# Altium PCB Pds 1st design.PcbDoc
Units mm, origin at the board's own origin, x right, y up, seen from the top; angles counter-clockwise.
Board outline 226.3 x 159.65 mm, 2 copper layers (Top Layer, Bottom Layer); 35 components, 11 nets, 58 pads, 10 vias.
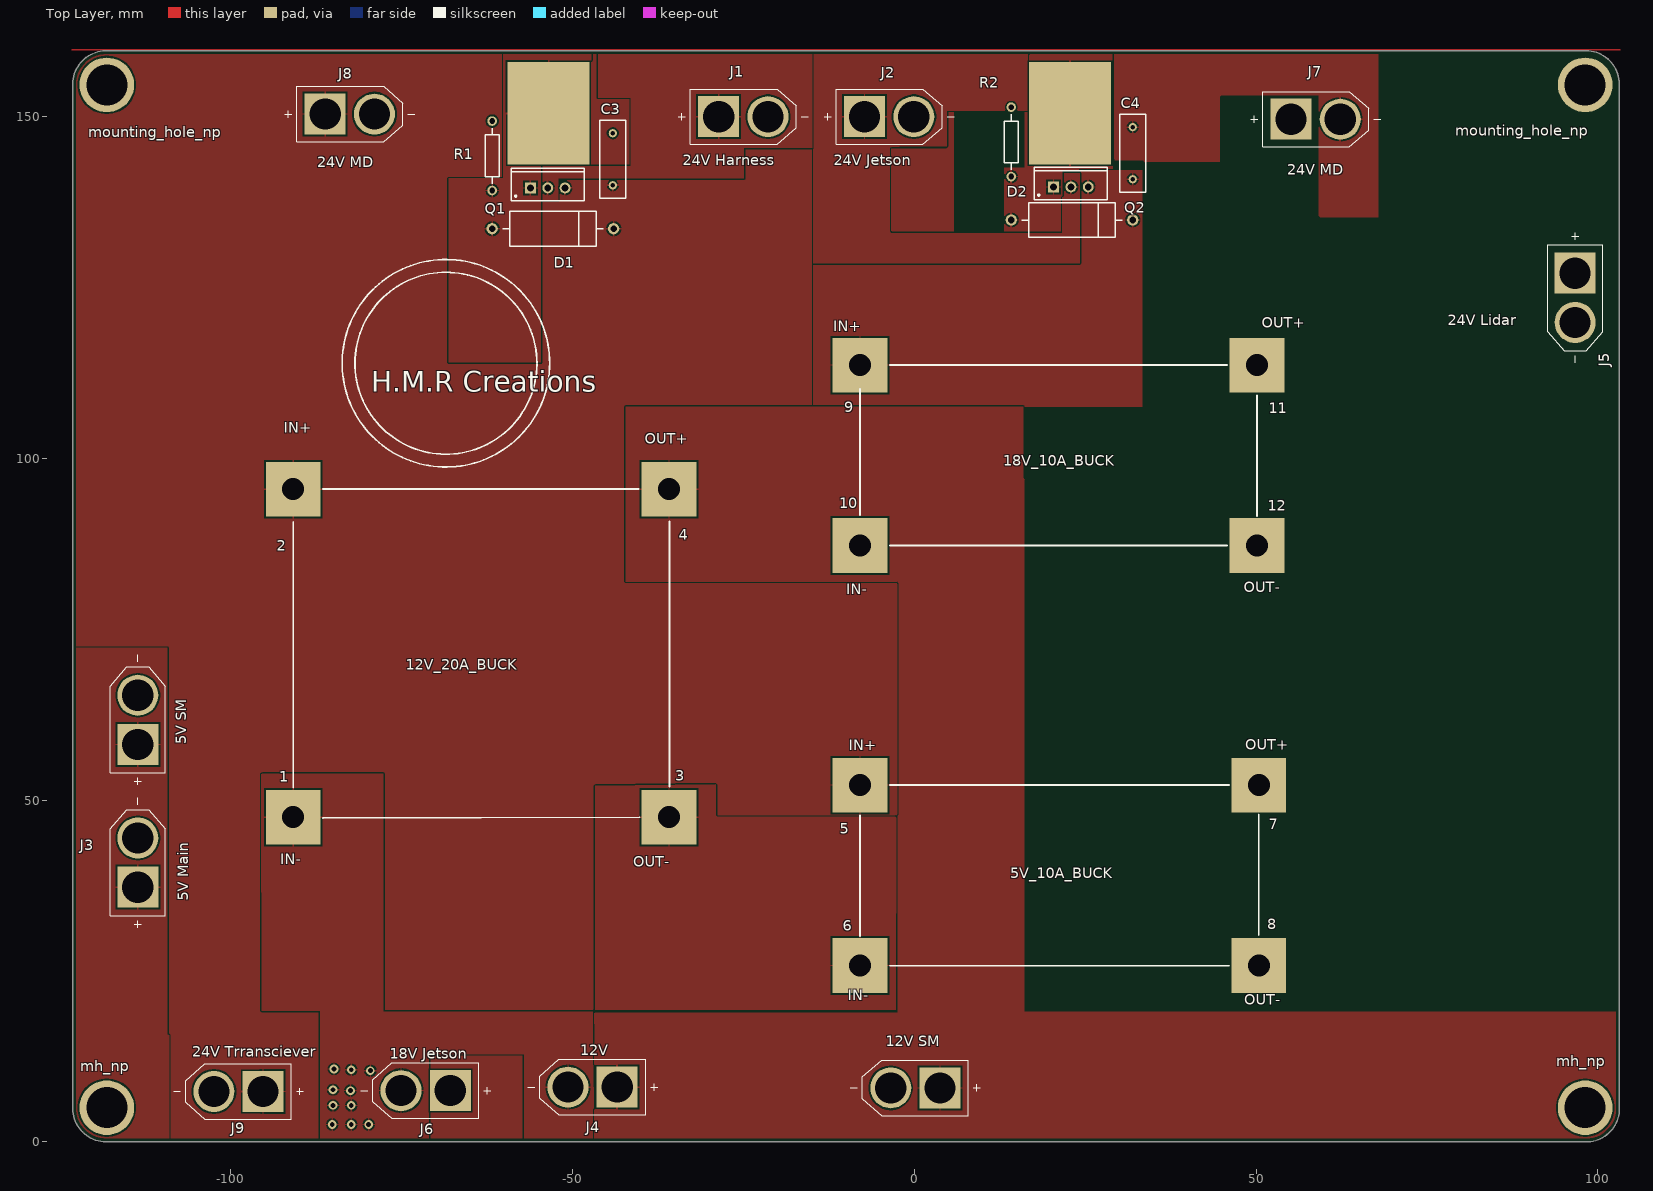
[diagram p0: Top Layer view]
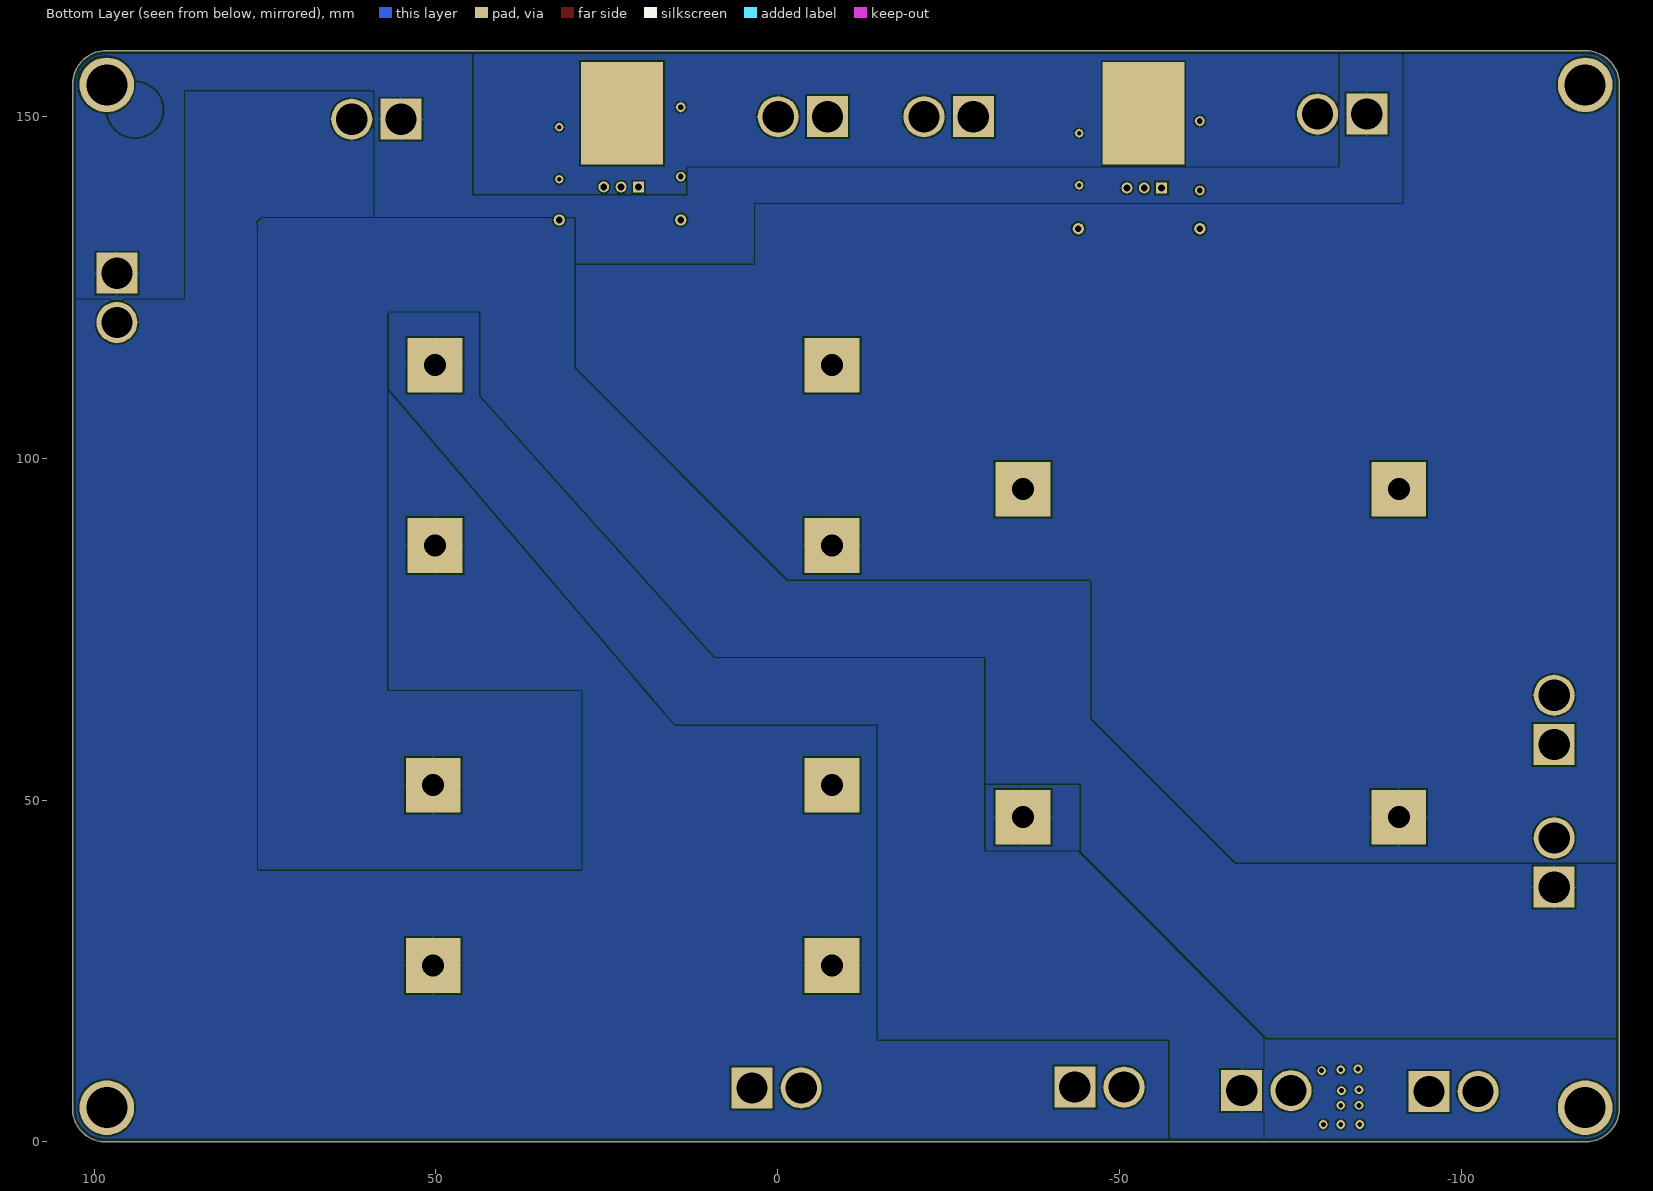
[diagram p1: Bottom Layer view, seen from below]
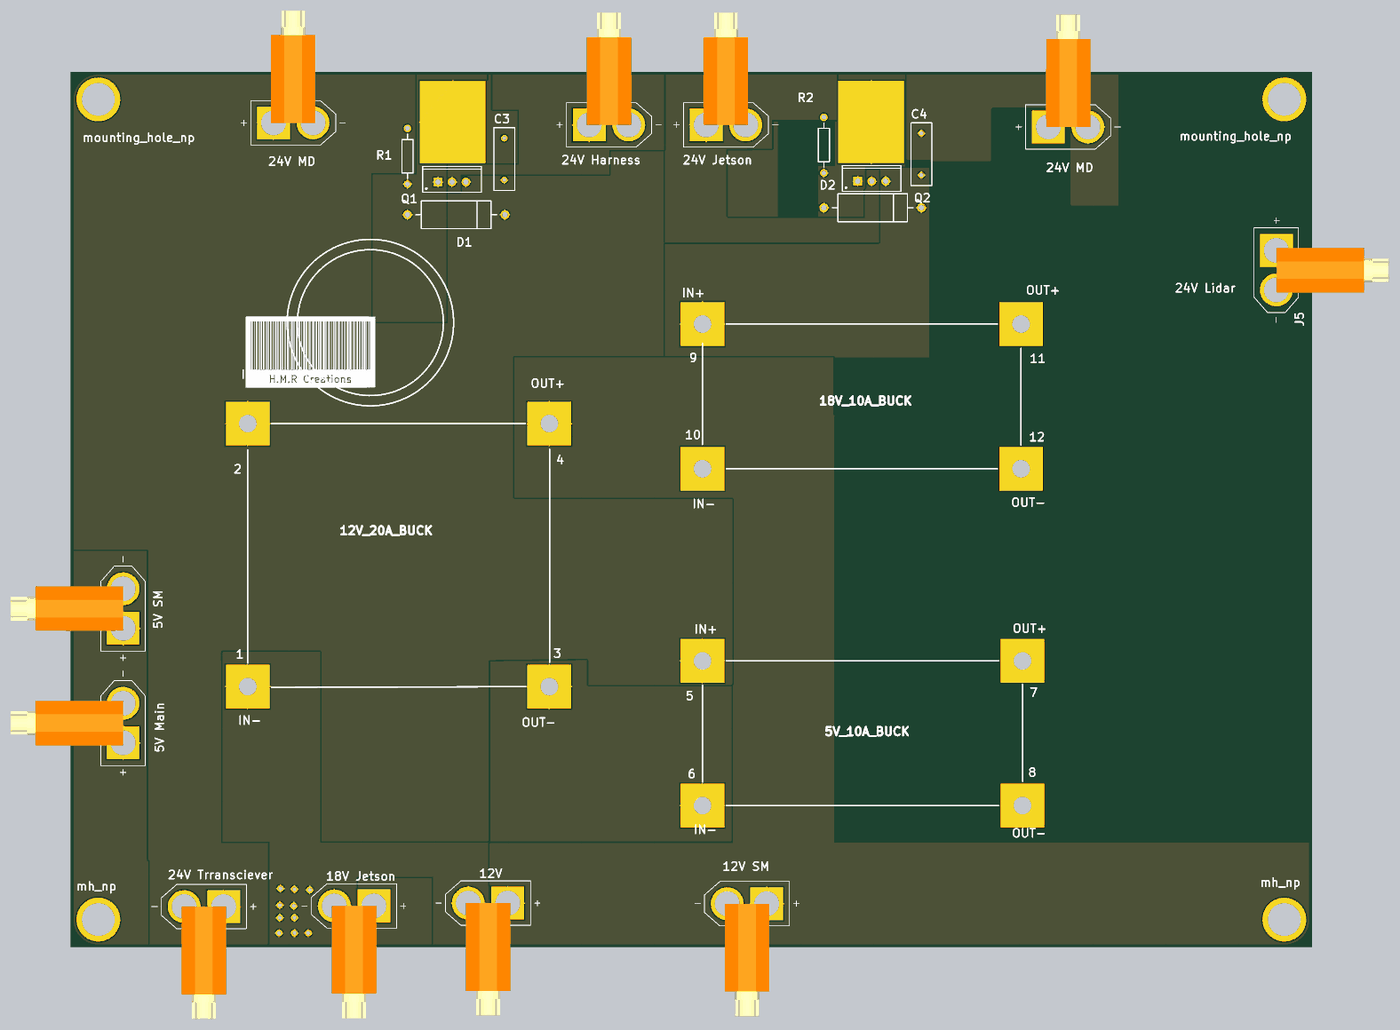
[diagram p2: 3D render of the assembled board from above, using the file's embedded part models]

## Layer stack, top to bottom
Top Solder: solder mask 0.0102, Solder Resist, Dk 3.5
Top Layer: signal copper 0.035
Dielectric 1: dielectric 0.32, FR-4, Dk 4.8
Bottom Layer: signal copper 0.035
Bottom Solder: solder mask 0.0102, Solder Resist, Dk 3.5

## Board outline
-123.15,154.542 -123.15,4.963 ccw(c-123.322,4.965) -123.15,4.965 ccw(c-123.277,4.965) -123.15,4.968 -123.15,4.866 ccw(c-118.237,4.913) -118.289,0 cw(c-118.286,-0.72) -118.289,0 98.596,0 ccw(c98.288,4.857) 103.145,4.549 103.145,154.717 cw(c103.272,154.717) 103.145,154.72 ccw(c98.333,154.751) 103.145,154.752 ccw(c98.251,154.752) 98.285,159.645 cw(c98.286,159.773) 98.251,159.65 cw(c98.217,159.773) 98.217,159.645 -118.29,159.645 cw(c-118.29,159.773) -118.333,159.653 cw(c-118.376,159.773) -118.372,159.645 ccw(c-118.209,154.705) -123.152,154.806 cw(c-123.278,154.785) -123.15,154.785 -123.15,154.535 ccw(c-123.278,154.538) -123.15,154.538 ccw(c-123.277,154.538) -123.15,154.541 ccw(c-123.279,154.538)

## Design rules (kind name [scope] priority, off if disabled: settings)
BoardOutlineClearance [All] p1: gap=0.254 ignorepadtopadclearanceinfootprint=FALSE except(0: Arc-SplitContinuation Track-SplitContinuation SMDPad-SplitContinuation THPad-SplitContinuation Via-SplitContinuation Fill-SplitContinuation Poly-SplitContinuation Region-SplitContinuation Text-SplitContinuation; 0.5: Arc-OutlineEdge Track-OutlineEdge SMDPad-OutlineEdge THPad-OutlineEdge Via-OutlineEdge Fill-OutlineEdge Poly-OutlineEdge Region-OutlineEdge Text-OutlineEdge)
Clearance "Schematic Clearance Constraint" [All] p1: gap=0.254 ignorepadtopadclearanceinfootprint=FALSE except(0: Arc-Hole Track-Hole SMDPad-Hole THPad-Hole Via-Hole Fill-Hole Poly-Hole Region-Hole Text-Hole)
Clearance [All] p2: gap=0.254 ignorepadtopadclearanceinfootprint=TRUE except(0: Arc-Hole Track-Hole SMDPad-Hole THPad-Hole Via-Hole Fill-Hole Poly-Hole Region-Hole Text-Hole; 0.1: Arc-SMDPad Track-SMDPad; 0.15: Arc-Arc Arc-Track Track-Track; 1: Fill-Fill Fill-Poly Fill-Region Poly-Poly Poly-Region Region-Region)
HoleSize PTH_HoleSize [All] p1: absolutevalues=TRUE maxlimit=2539.975 minlimit=0.5 maxpercent=100.000 minpercent=20.000
MinimumSolderMaskSliver [All] p1: minsoldermaskwidth=0.08
PolygonConnect [All] p1: connectstyle=Relief reliefconductorwidth=0.254 reliefentries=4 polygonreliefangle="90 Angle" airgapwidth=0.254
RoutingVias [All] p1: holewidth=0.711 width=1.27 viastyle="Through Hole" minholewidth=0.711 minwidth=1.27 maxholewidth=0.711 maxwidth=1.27
SMDToCorner [All] p1: distance=0
SilkToSilkClearance [All] p1: silktosilkclearance=0
SilkToSolderMaskClearance [IsPad] p1: minsilkscreentomaskgap=0 clearancetoexposedcopper=TRUE
SolderMaskExpansion [All] p1: expansion=0.102 istentingtop=FALSE
Width [All] p1: maxlimit=0.254 minlimit=0.15 preferedwidth=0.254
26 further rules are at their usual default settings.

## Classes and differential pairs
component class Sheet1: 2 4 5 6 7 8 9 10 11 12 C3 C4 D1 D2 J1 J2 J3 J4 J5 J6 J7 J8 J9 Q1 Q2 R1 R2 rail

## Components (designator, comment, footprint, x,y, rotation, side; value= is the part's Value field where it differs from the comment)
1 "mounting_h_p_10A buck" "mounting_h_p 10A buck"#1 -90.892,47.498 r90 top
2 "mounting_h_p_10A buck" "mounting_h_p 10A buck"#2 -90.892,93.138 r90 top
3 "mounting_h_p_10A buck" "mounting_h_p 10A buck"#3 -38.252,47.498 r90 top locked
4 "mounting_h_p_10A buck" "mounting_h_p 10A buck"#4 -38.252,93.138 r90 top
5 "mounting_h_p_10A buck" "mounting_h_p 10A buck"#1 -7.961,52.197 r90 top
"5V SM" "Comment" AMASS_XT60-M -113.625,61.742 r90 top
6 "mounting_h_p_10A buck" "mounting_h_p 10A buck"#1 -7.961,25.797 r90 top
7 "mounting_h_p_10A buck" "mounting_h_p 10A buck"#1 50.393,52.197 r90 top
8 "mounting_h_p_10A buck" "mounting_h_p 10A buck"#1 50.393,25.797 r90 top
9 "mounting_h_p_10A buck" "mounting_h_p 10A buck"#1 -7.961,113.649 r90 top
10 "mounting_h_p_10A buck" "mounting_h_p 10A buck"#1 -7.961,87.249 r0 top
11 "mounting_h_p_10A buck" "mounting_h_p 10A buck"#1 50.139,113.649 r0 top
12 "mounting_h_p_10A buck" "mounting_h_p 10A buck"#1 50.139,87.249 r0 top
"12V SM" "Comment" AMASS_XT60-M 0.148,7.894 r180 top
C3 "Cap" RAD-0.3 -44.121,143.764 r270 top value=100pF
C4 "Cap" RAD-0.3 31.952,144.653 r270 top value=100pF
D1 "D Zener" DIODE-0.7 -52.884,133.604 r0 top
D2 "D Zener" DIODE-0.7 23.062,134.876 r0 top
J1 "XT60-M" AMASS_XT60-M -25.023,149.987 r0 top
J2 "XT60-M" AMASS_XT60-M -3.687,149.987 r0 top
J3 "XT60-M" AMASS_XT60-M -113.627,40.856 r90 top
J4 "XT60-M" AMASS_XT60-M -47.077,8.001 r180 top
J5 "XT60-M" AMASS_XT60-M 96.687,123.488 r270 top
J6 "XT60-M" AMASS_XT60-M -71.505,7.493 r180 top
J7 "XT60-M" AMASS_XT60-M 58.713,149.62 r0 top
J8 "XT60-M" AMASS_XT60-M -82.602,150.368 r0 top
J9 "XT60-M" AMASS_XT60-M -98.893,7.366 r180 top
mh_np "Comment" np_20A_mountinghole#1 -117.908,5.08 r0 top
mh_np "Comment" np_20A_mountinghole#2 98.246,4.953 r0 top
mounting_hole_np "Comment" np_20A_mountinghole#3 98.246,154.686 r0 top
mounting_hole_np "Comment" np_20A_mountinghole#4 -118.162,154.559 r0 top
Q1 "PMOS-2" TO-220AB -53.646,139.573 r0 top
Q2 "PMOS-2" TO-220AB 22.9,139.72 r0 top
R1 "Res2" AXIAL-0.4 -61.774,144.272 r270 top value=1K
R2 "Res2" AXIAL-0.4 14.172,146.304 r270 top value=1K

## Footprints (in the part's own frame and the unit in brackets; to place one, negate y for a bottom-side part, rotate by r counter-clockwise, add the part's x,y. Pads: shape width x height; smd on the part's side, far side on the other; paste and mask are expansions set on the pad)
AMASS_XT60-M [mm]
  round 6 hole 4.55: N(3.6,0)
  rect 6x6 hole 4.55: P(-3.6,0)
  silkscreen extent -9.5,-4.05 9.5,4.05, body extent -4.05,0 4.05,20.5, height 7.75
AXIAL-0.4 [mm] "Axial Device, Thru-Hole; 2 Leads; 0.4 in Pin Spacing"
  round 1.4 hole 0.85: 1(-5.08,0) 2(5.08,0)
  silkscreen extent -4.06,-1.02 4.06,1.02
DIODE-0.7 [mm] "Diode, Thru-Hole; 2 Leads; 0.7 in Pin Spacing"
  round 1.65 hole 1: 1(-8.89,0) 2(8.89,0)
  silkscreen extent -7.37,-2.54 7.37,2.54
"mounting_h_p 10A buck"#1 [mm]
  rect 8x8 hole 3.22 mask+0.102: ""(0,0)
"mounting_h_p 10A buck"#2 [mm]
  rect 8x8 hole 3.22 mask+0.102: ""(2.36,0)
"mounting_h_p 10A buck"#3 [mm]
  rect 8x8 hole 3.22 mask+0.102: ""(0,-2.36)
"mounting_h_p 10A buck"#4 [mm]
  rect 8x8 hole 3.22 mask+0.102: ""(2.36,-2.36)
np_20A_mountinghole#1 [mm]
  round 8 hole 6 unplated: MH_NP_6mm(-0.242,-0.08)
np_20A_mountinghole#2 [mm]
  round 8 hole 6 unplated: MH_NP_6mm(-0.101,0.047)
np_20A_mountinghole#3 [mm]
  round 8 hole 6 unplated: MH_NP_6mm(-0.101,-0.041)
np_20A_mountinghole#4 [mm]
  round 8 hole 6 unplated: MH_NP_6mm(0.012,0.086)
RAD-0.3 [mm] "Radial Cap, Thru-Hole; 2 Leads; 0.3 in Pin Spacing"
  round 1.2 hole 0.7: 1(-3.81,0) 2(3.81,0)
  silkscreen extent -5.71,-1.91 5.71,1.91
TO-220AB [mm] "TO, Thru-Hole, Vertical, Heatsink Mounted; 3 In-Line Leads; Pitch 2.54 mm"
  rect 1.6x1.6 hole 1: 1(-2.54,0)
  round 1.6 hole 1: 2(0,0) 3(2.54,0)
  silkscreen extent -5.35,-1.85 5.35,2.85, body extent -5.4,-1.9 5.4,2.9, height 19.3

## Part data
C3 C4: "Capacitor", LatestRevisionDate=17-Jul-2002, LatestRevisionNote="Re-released for DXP Platform.", PackageDescription="Radial Cap, Thru-Hole; 2 Leads; 0.3 in Pin Spacing", PackageReference=RAD-0.3, Published=8-Jun-2000, Publisher="Altium Limited"
D1 D2: "Zener Diode", LatestRevisionDate=17-Jul-2002, LatestRevisionNote="Re-released for DXP Platform.", PackageDescription="Diode, Thru-Hole; 2 Leads; 0.7 in Pin Spacing", PackageReference=DIODE-0.7, Published=8-Jun-2000, Publisher="Altium Limited"
J1 J2 J3 J4 J5 J6 J7 J8 J9: "Plug; DC supply; XT60; male; PIN: 2; for cable; soldered; 30A; 500V", Package=Package, Availability="Not in stock", Check_prices=https://www.snapeda.com/parts/XT60-M/AMASS/view-part/?ref=eda, MF=AMASS, MP=XT60-M, Price=None, SnapEDA_Link=https://www.snapeda.com/parts/XT60-M/AMASS/view-part/?ref=snap
Q1 Q2: "P-Channel Power MOSFET", ComponentLink1Description="Manufacturer Link", ComponentLink1URL=http://www.irf.com/, DatasheetVersion=PD-9.390D, LatestRevisionDate=17-Jul-2002, LatestRevisionNote="Re-released for DXP Platform.", Note="Pin 4 not drawn and electrically connected to Pin 2.", PackageDescription="TO, Thru-Hole, Vertical, Heatsink Mounted; 3 In-Line Leads; Pitch 2.54 mm", PackageReference=TO-220AB, PackageVersion=Feb-1997, Published=8-Jun-2000, Publisher="Altium Limited"
R1 R2: "Resistor", LatestRevisionDate=17-Jul-2002, LatestRevisionNote="Re-released for DXP Platform.", PackageDescription="Axial Device, Thru-Hole; 2 Leads; 0.4 in Pin Spacing", PackageReference=AXIAL-0.4, Published=8-Jun-2000, Publisher="Altium Limited"

## Free pads (board coordinates)
  rect 12x15 all layers, no hole: 4(-53.519,150.495) 5(22.773,150.515)

## Via types
v1: diameter 1.27, hole 0.711, Top Layer to Bottom Layer, 10 vias

## Nets (pads, with @x,y where several pads share a name; then routed paths per layer and width w, separated by ;. In a path a pad name is that pad's centre, name@x,y a point inside that pad or via, vN(x,y) a via of type N, cw(c..) or ccw(c..) an arc to the next point about the centre after c; other vN are vias at no path point)
GND: 1. 3. 6. 8. 10. 12. "5V SM.N" "12V SM.N" C3.1 C4.1 J1.N J2.N J3.N J4.N J5.N J6.N J7.N J8.N J9.N R1.1 R2.1 | length 1.2
  Top Layer w0.254: J7.N@62.313,148.634 J7.N
  Bottom Layer w0.254: 1.@-90.349,46.863 1.@-90.222,46.736
  other v1: -85.177,2.54 -82.383,2.54 -79.843,2.54 -85.05,5.334 -82.383,5.334 -82.51,7.493 -85.05,7.62 -79.589,10.414 -82.383,10.541 -84.923,10.668
Net1_1: 2. 5. C3.2 D1.2 J5.P J7.P J8.P J9.P Q1.3
Net3_1: 4. "12V SM.P" J4.P
Net5_1: 9. C4.2 D2.2 Q2.3
Net7_1: 11. J6.P
Net8_1: 
Net11_1: 7. "5V SM.P" J3.P
NetD1_1: D1.1 pad.4 Q1.1 R1.2
NetD2_1: D2.1 pad.5 Q2.1 R2.2
NetJ1_P: J1.P Q1.2
NetJ2_P: J2.P Q2.2
pads on no net: mh_np.MH_NP_6mm mounting_hole_np.MH_NP_6mm

## Polygon pours and split planes (outlines as drawn)
Net1_1 on Top Layer "NET1_1_L01_P068" (solid, pour order 68): 5.755,159.786 5.755,0.061 5.542,0.274 -123.277,0.274 -123.277,159.772 -123.277,159.773 -123.264,159.786 -123.023,159.786 -123.264,159.786 -123.023,159.786
Net11_1 on Top Layer "NET11_1_L01_P067" (solid, pour order 67): -123.15,72.537 -109.053,72.537 -109.053,0.068 -123.15,0.068 -123.15,72.41
Net3_1 on Top Layer "NET3_1_L01_P066" (solid, pour order 66): -2.246,0.274 -2.246,19.07 103.037,19.07 103.037,0.274
GND on Top Layer "GND_L01_P064" (solid, pour order 64): -77.703,53.848 -77.703,51.126 -77.703,0 -86.031,0 -86.92,0.889 -86.92,19.177 -95.81,19.177 -95.81,53.848 -95.81,19.177 -95.81,53.848
Net1_1 on Top Layer "NET1_1_L01_P013" (solid, pour order 13): -123.277,159.773 -95.888,159.773 -95.733,0 -109.053,0 -109.053,15.875 -109.053,72.537 -123.277,72.537
GND on Top Layer "GND_L01_P063" (solid, pour order 63): 29.223,143.327 29.223,143.448 29.223,159.645 67.506,159.645 67.893,159.258 67.893,135.255 59.384,135.255 59.13,135.509 59.13,153.162 44.906,153.162 44.652,152.908 44.652,143.383
Net5_1 on Top Layer "NET5_1_L01_P060" (solid, pour order 60): -14.784,128.524 -14.784,107.569 33.349,107.569 33.349,142.133 24.205,142.133 24.205,128.524
NetJ2_P on Top Layer "NETJ2_P_L01_P059" (solid, pour order 59): -14.504,159.645 -14.498,159.639 -3.608,159.639 -3.608,133.223 -3.354,132.969 21.665,132.969 21.665,141.752 24.205,141.752 24.205,128.524 -14.784,128.524 -14.784,159.645
NetD2_1 on Top Layer "NETD2_1_L01_P057" (solid, pour order 57): 21.665,132.969 21.665,142.26 29.031,142.26 29.031,159.639 29.025,159.645 16.169,159.645 16.169,142.494 13.156,142.494 13.156,132.969
NetJ1_P on Top Layer "NETJ1_P_L01_P054" (solid, pour order 54): -52.249,137.795 -52.122,137.795 -52.122,140.97 -24.944,140.97 -24.944,159.131 -41.454,159.131 -41.489,159.095 -41.489,142.748 -41.962,142.748 -54.662,142.748 -54.662,137.808 -54.649,137.795 -52.122,137.795
NetD1_1 on Top Layer "NETD1_1_L01_P053" (solid, pour order 53): -63.171,137.808 -62.904,137.808 -54.662,137.808 -54.662,142.748 -54.655,142.741 -47.265,142.741 -47.265,159.621 -47.247,159.639 -60.123,159.639 -60.123,140.97 -63.171,140.97
NetD1_1 on Top Layer "NETD1_1_L01_P049" (solid, pour order 49): -54.662,140.97 -54.662,114.046 -68.124,114.046 -68.124,140.97
NetJ1_P on Top Layer "NETJ1_P_L01_P017" (solid, pour order 17): -46.28,159.773 -46.28,152.781 -41.489,152.781 -41.489,145.415 -14.946,145.415 -14.946,159.773
NetJ2_P on Top Layer "NETJ2_P_L01_P027" (solid, pour order 27): -14.819,145.542 -14.821,145.544 -14.821,159.773 16.585,159.773 16.585,150.876 4.739,150.876 4.739,145.669 -14.675,145.397 -14.784,145.415
GND on Top Layer "GND_L01_P025" (solid, pour order 25): -87.201,-0.127 -86.828,-0.127 -71.049,-0.127 -71.049,12.668 -71.049,12.827 -57.11,12.827 -57.11,-0.122 -57.105,-0.127 -57.095,-0.117 -46.823,-0.117 -47.077,19.05 -48.728,19.05 -87.209,19.05 -87.209,-0.119
Net3_1 on Top Layer "NET3_1_L01_P019" (solid, pour order 19): -46.823,12.446 -46.823,-0.117 -46.834,-0.127 -46.823,-0.117 16.042,-0.127 16.042,96.774 16.169,96.901 15.915,97.155 15.915,107.569 -42.505,107.569 -42.505,81.724 -2.373,81.724 -2.373,81.407 -2.449,18.923 -32.854,18.923 -33.234,18.923 -46.823,18.923
GND on Top Layer "GND_L01_P026" (solid, pour order 26): -46.696,52.578 -46.696,19.304 -2.195,19.304 -2.348,19.456 -2.348,47.879 -28.789,47.879 -28.789,52.578 -46.442,52.578 -46.569,52.578
no net on Top Layer "NONET_L01_P000" (solid, pour order 0): -123.277,159.773 103.272,159.773
GND on Bottom Layer "GND_L02_P062" (solid, pour order 62): -122.734,159.385 102.691,159.385 102.691,0 -122.988,0 -122.988,159.131
Net1_1 on Bottom Layer "NET1_1_L02_P056" (solid, pour order 56): 3.504,142.494 3.504,128.524 29.666,128.524 29.666,135.128 58.876,135.128 58.876,138.43 13.156,138.43 13.156,142.494 12.394,142.494
Net1_1 on Bottom Layer "NET1_1_L02_P055" (solid, pour order 55): -91.365,159.639 -82.221,159.639 -82.221,142.494 12.521,142.494 12.521,137.414 -91.365,137.414 -91.365,159.645
Net1_1 on Bottom Layer "NET1_1_L02_P048" (solid, pour order 48): 44.68,135.128 58.968,135.128 58.968,153.631 58.929,153.67 59.183,153.924 86.908,153.924 86.908,123.2 86.933,123.175 103.271,123.175 103.271,159.773 103.144,159.645 44.75,159.645 44.75,135.198
Net7_1 on Bottom Layer "NET7_1_L02_P022" (solid, pour order 22): -71.235,-0.127 -69.429,-0.127 -57.364,-0.127 -57.364,14.986 -14.692,14.986 -14.692,49.784 -14.692,61.087 9.311,61.087 15.026,61.087 56.809,110.109 56.809,121.285 43.728,121.285 43.728,109.093 9.311,70.739 -30.186,70.739 -30.186,42.418 -43.902,42.418 -71.08,15.24 -71.049,15.208 -71.049,-0.127
Net11_1 on Bottom Layer "NET11_1_L02_P023" (solid, pour order 23): -123.277,40.642 -66.887,40.642 -45.68,61.849 -45.68,82.042 -1.357,82.042 29.758,113.157 29.758,135.128 75.478,135.128 76.24,134.366 75.986,134.112 75.986,39.878 28.742,39.878 28.742,40.469 28.742,41.402 28.742,65.913 57.19,65.913 57.19,66.929 57.19,69.723 57.19,121.158 43.855,121.158 43.728,121.285 43.728,105.156 9.311,70.739 -30.186,70.739 -30.186,52.451 -44.41,52.451 -44.41,52.07 -44.41,51.562 -44.41,42.418 -71.629,15.199 -123.277,15.199 -123.277,40.469

## Silkscreen, mask and mechanical layers (free items; w line width, h text height)
Top Overlay:
  circle w0.254: c-68.54,113.919 r15.185
  lines w0.254: -90.892,51.816 -90.892,90.678 ; -86.539,47.371 -40.211,47.498 ; -86.539,95.504 -40.311,95.504 ; -55.23,113.777 cw(c-68.54,113.919) -55.23,113.919 ; -35.839,51.943 -35.839,90.805 ; -7.961,30.099 -7.961,47.752 ; -7.961,91.694 -7.961,110.134 ; -3.608,25.781 46.049,25.781 ; -3.608,52.197 46.049,52.197 ; -3.608,87.249 45.795,87.249 ; -3.608,113.665 45.795,113.665 ; 50.127,91.567 50.127,109.204 ; 50.393,30.226 50.393,47.879
  text "24V Harness" at -33.869,142.875 h1.52
  text "24V Jetson" at -11.771,142.875 h1.52
  text "24V MD" at -87.336,142.621 h1.52
  text "24V MD" at 54.523,141.478 h1.52
  text "24V Lidar" at 78.018,119.507 h1.52
  text "OUT+" at 50.84,119.126 h1.52
  text "IN+" at -11.898,118.618 h1.52
  text "H.M.R Creations" at -79.462,109.748 h3
  text "IN+" at -92.289,103.759 h1.52
  text "OUT+" at -39.457,102.108 h1.52
  text "18V_10A_BUCK" at 12.986,98.925 h1.52
  text "OUT-" at 48.173,80.391 h1.52
  text "IN-" at -9.993,80.137 h1.52
  text "12V_20A_BUCK" at -74.382,69.088 h1.52
  text "OUT+" at 48.427,57.404 h1.52
  text "IN+" at -9.612,57.277 h1.52
  text "IN-" at -92.797,40.64 h1.52
  text "OUT-" at -41.108,40.259 h1.52
  text "5V_10A_BUCK" at 14.002,38.6 h1.52
  text "5V Main" at -106.259,35.306 h1.52 r90
  text "IN-" at -9.739,20.701 h1.52
  text "OUT-" at 48.3,20.066 h1.52
  text "12V" at -48.855,12.7 h1.52
  text "24V Trransciever" at -105.624,12.446 h1.52
  text "18V Jetson" at -76.795,12.192 h1.52